# EAGLE board tx (EAGLE 6.1)
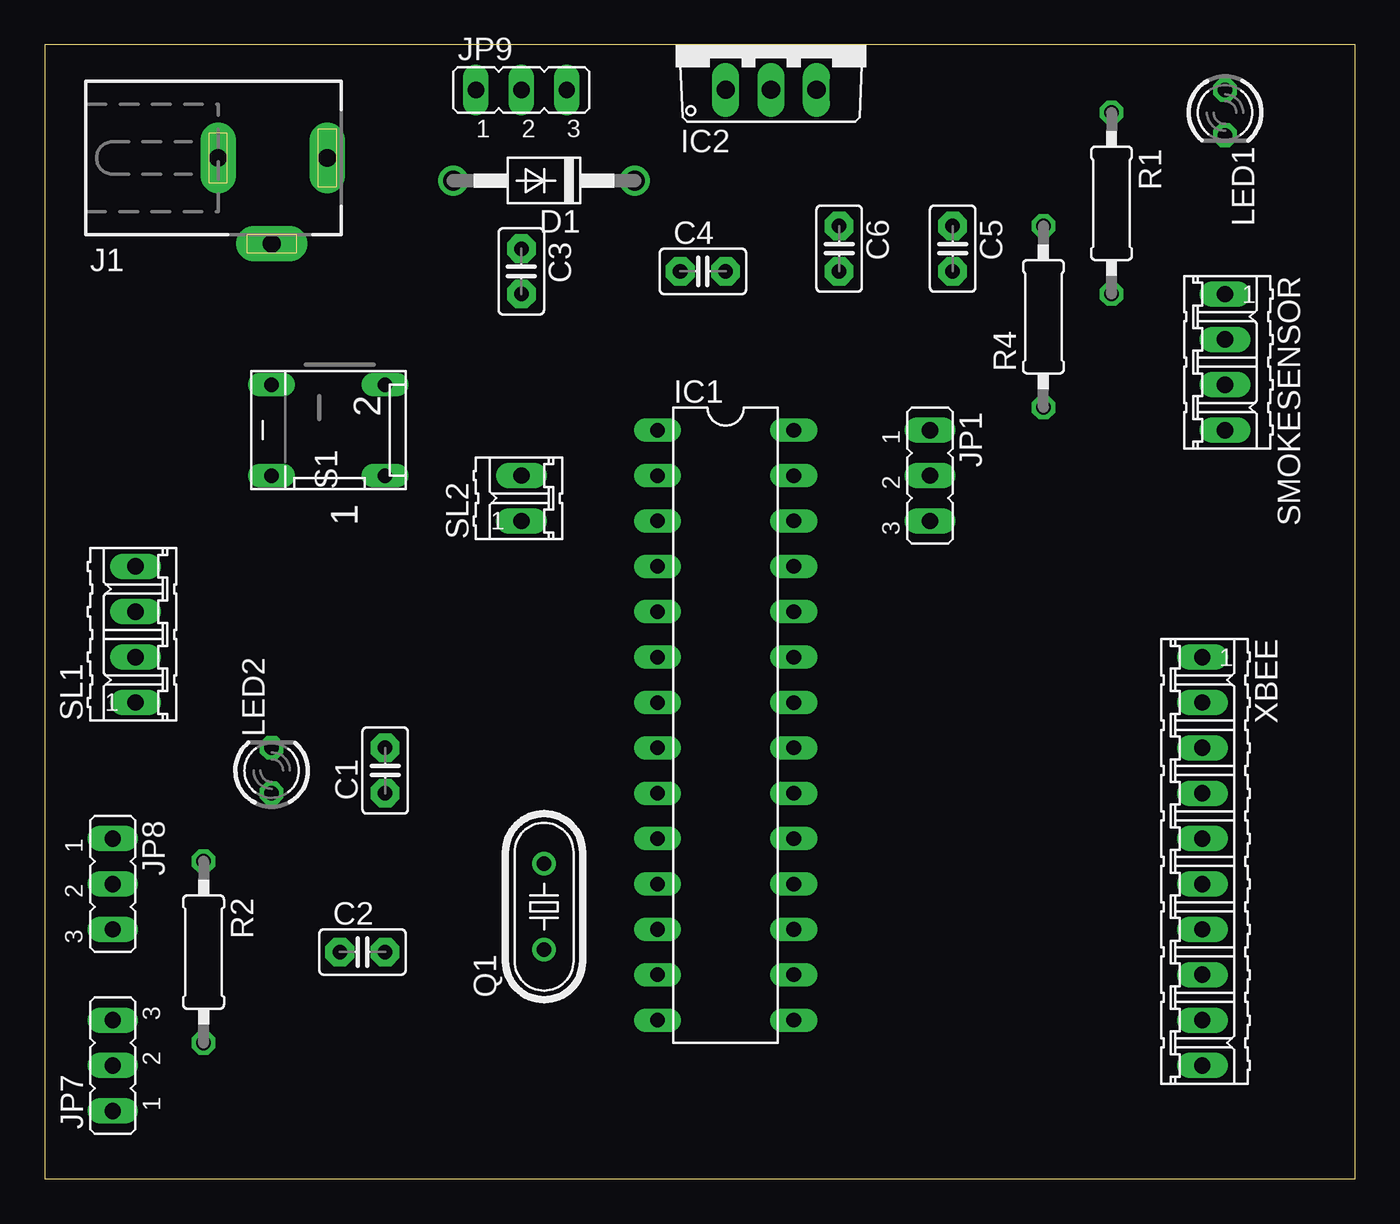
[diagram p0: board, top side]
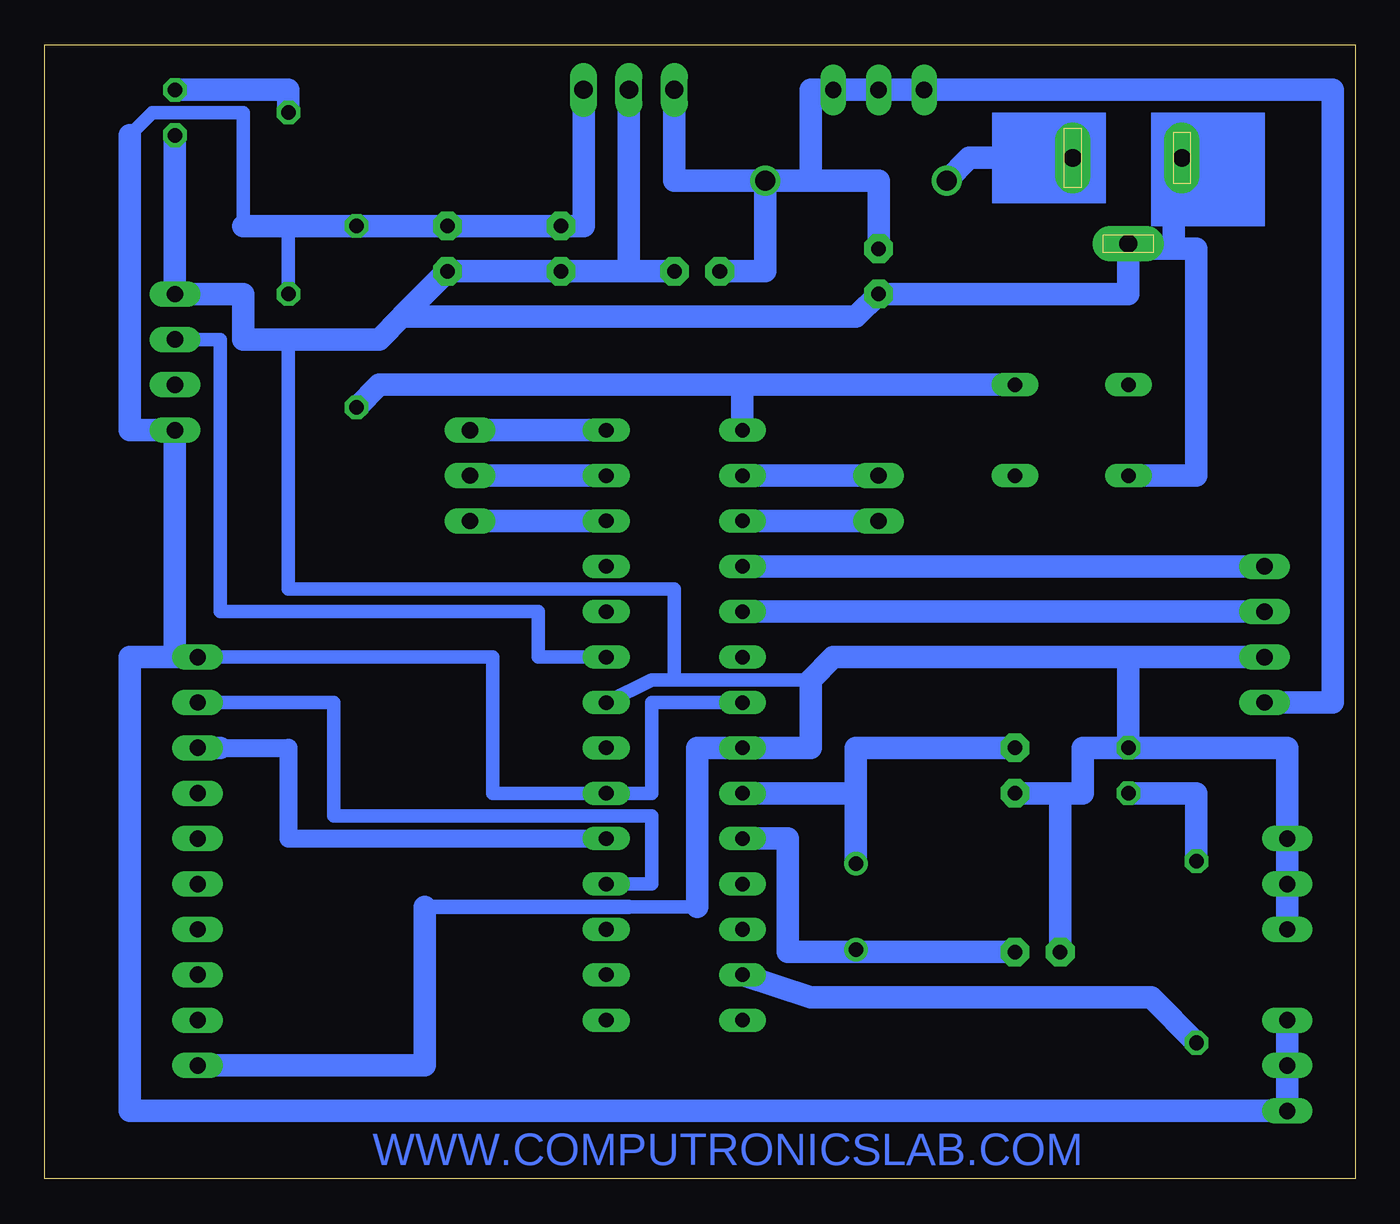
[diagram p1: board, bottom side, seen from below]

Size 73.33 x 63.49 mm. Coordinates in mm from the lower left corner, seen from the top.
Outline: 0,0 73.33,0 73.33,63.49 0,63.49 0,0
Copper layers (1*16): Top 0.035mm / dielectric 1.5mm / Bottom 0.035mm
Design rules: minimum track width 30mil, minimum drill 24mil, track to track 8mil, track to pad 8mil, pad to pad 8mil, via to via 8mil, smd to smd 8mil, copper to edge 40mil, drill to drill 8mil, minimum pad ring 10mil, minimum via ring 8mil, stop-mask expansion 4mil, vias tented up to drill 0mil, thermal gap 10mil

## Footprints (pad centres in the part's own frame; a part is rotated, then mirrored left to right if it is on the bottom)
C2.5-2 = drill 0.813 pad 1.6 octagon: 1 -1.27,0; 2 1.27,0
DO41-10 = drill 1.118: A 5.08,0; C -5.08,0
DIL28-3 = drill 0.813 long: 1 -16.51,-3.81; 2 -13.97,-3.81; 3 -11.43,-3.81; 4 -8.89,-3.81; 5 -6.35,-3.81; 6 -3.81,-3.81; 7 -1.27,-3.81; 8 1.27,-3.81; 9 3.81,-3.81; 10 6.35,-3.81; 11 8.89,-3.81; 12 11.43,-3.81; 13 13.97,-3.81; 14 16.51,-3.81; 15 16.51,3.81; 16 13.97,3.81; 17 11.43,3.81; 18 8.89,3.81; 19 6.35,3.81; 20 3.81,3.81; 21 1.27,3.81; 22 -1.27,3.81; 23 -3.81,3.81; 24 -6.35,3.81; 25 -8.89,3.81; 26 -11.43,3.81; 27 -13.97,3.81; 28 -16.51,3.81
TO220V = drill 1.016 long: 1 -2.54,-2.54; 2 0,-2.54; 3 2.54,-2.54
DCJ0303 = drill 1 pad 2 long: 1 0,3.1; 2 4.8,0; 3 0,-3
JP2 = drill 0.914 long: 1 -2.54,0; 2 0,0; 3 2.54,0
LED3MM = drill 0.813 octagon: A -1.27,0; K 1.27,0
HC49/S = drill 0.813: 1 -2.413,0; 2 2.413,0
0207/10 = drill 0.813 octagon: 1 -5.08,0; 2 5.08,0
DP-02 = drill 0.813 long: 1 -2.54,-2.54; 2 2.54,-2.54; 3 2.54,3.81; 4 -2.54,3.81
04P = drill 0.914 long: 1 -3.81,0; 2 -1.27,0; 3 1.27,0; 4 3.81,0
02P = drill 0.914 long: 1 -1.27,0; 2 1.27,0
10P = drill 0.914 long: 1 -11.43,0; 2 -8.89,0; 3 -6.35,0; 4 -3.81,0; 5 -1.27,0; 6 1.27,0; 7 3.81,0; 8 6.35,0; 9 8.89,0; 10 11.43,0

## Placement (x,y rotation side)
C1  22pf  [C2.5-2]  19.05,22.86 90 top
C2  22pf  [C2.5-2]  17.78,12.7 0 top
C3  100UF  [C2.5-2]  26.67,50.8 270 top
C4  0.1uf  [C2.5-2]  36.83,50.8 0 top
C5  0.1uf  [C2.5-2]  50.8,52.07 270 top
C6  4.7uf  [C2.5-2]  44.45,52.07 270 top
D1  1N4007  [DO41-10]  27.94,55.88 180 top
IC1  ATMEGA328  [DIL28-3]  38.1,25.4 270 top
IC2  7805  [TO220V]  40.64,63.5 0 top
J1  [DCJ0303]  12.7,57.15 270 top
JP1  [JP2]  49.53,39.37 270 top
JP7  [JP2]  3.81,6.35 90 top
JP8  [JP2]  3.81,16.51 270 top
JP9  [JP2]  26.67,60.96 0 top
LED1  [LED3MM]  66.04,59.69 270 top
LED2  [LED3MM]  12.7,22.86 90 top
Q1  16MHZ  [HC49/S]  27.94,15.24 90 top
R1  220R  [0207/10]  59.69,54.61 270 top
R2  330R  [0207/10]  8.89,12.7 270 top
R4  10K  [0207/10]  55.88,48.26 90 top
S1  [DP-02]  16.51,41.91 90 top
SL1  GSM  [04P]  5.08,30.48 90 top
SL2  [02P]  26.67,38.1 90 top
SMOKESENSOR  [04P]  66.04,45.72 270 top
XBEE  [10P]  64.77,17.78 270 top

## Library data of the parts
C1-C6 = capacitor-wima
D1 = diode
IC1 = quantum-research-group; OC_FARNELL: unknown; OC_NEWARK: unknown
IC2 = linear
J1 = con-jack; OC_FARNELL: unknown; OC_NEWARK: unknown
JP1 JP7-JP9 = jumper
LED1 LED2 = led
Q1 = crystal; OC_FARNELL: 1667008; OC_NEWARK: unknown
R1 R2 R4 = rcl
S1 = switch-dil; MPN: MCDP02; OC_FARNELL: 1255233; OC_NEWARK: 26M1095
SL1 SL2 SMOKESENSOR XBEE = con-amp-quick; OC_FARNELL: unknown; OC_NEWARK: unknown

## Nets
N$1: C1.2 IC1.9 Q1.2
N$2: C2.2 IC1.10 Q1.1
N$3: D1.A J1.1
N$4: C5.1 C6.1 IC1.7 IC1.20 IC2.3 JP7.1 JP7.2 JP7.3 R1.2 R4.2 SMOKESENSOR.4 XBEE.1
N$5: C1.1 C2.1 C3.2 C4.2 C5.2 C6.2 IC1.8 IC1.22 IC2.2 J1.2 J1.3 JP8.1 JP8.2 JP8.3 LED1.K LED2.K S1.4 SL1.2 SMOKESENSOR.1 XBEE.10
N$6: LED1.A R1.1
N$7: C3.1 C4.1 D1.C IC2.1 JP9.1 JP9.2 JP9.3 SL1.1
N$8: IC1.28 JP1.1
N$9: IC1.27 JP1.2
N$10: IC1.26 JP1.3
N$11: IC1.18 XBEE.2
N$12: IC1.19 XBEE.3
N$13: IC1.23 SMOKESENSOR.2
N$14: IC1.5 SL1.3
N$15: IC1.2 SL2.2
N$16: IC1.3 SL2.1
N$17: IC1.4 SL1.4
N$21: IC1.13 R2.2
N$31: IC1.1 R4.1 S1.2
N$32: LED2.A R2.1

## Tracks (layer width: path | path; a pad name or v marks a point on that pad's centre or on a via)
N$1
  Bottom 0.762: 27.94,21.59 27.94,17.78 | 27.94,17.78 Q1.2 27.94,17.78
  Bottom 1.27: 27.94,21.59 31.75,21.59 IC1.9 | 27.94,17.78 27.94,24.13 C1.2
N$2
  Bottom 0.762: 27.94,12.7 Q1.1 27.94,12.7
  Bottom 1.27: C2.2 27.94,12.7 31.75,12.7 31.75,19.05 IC1.10
N$3
  Bottom 1.27: D1.A 21.59,57.15 16.51,57.15 J1.1
N$4
  Bottom 0.762: 53.34,53.34 R4.2 59.69,53.34 R1.2 | IC1.7 36.83,26.67 39.37,26.67 39.37,21.59 IC1.20 48.26,21.59 48.26,29.21 49.53,29.21 XBEE.1 | 62.23,53.34 62.23,54.61 62.23,59.69 64.77,59.69 67.31,59.69 68.58,58.42
  Bottom 1.27: IC2.3 43.18,53.34 C6.1 C5.1 53.34,53.34 R4.2 59.69,53.34 62.23,53.34 | JP7.3 JP7.2 JP7.1 66.04,3.81 68.58,3.81 68.58,5.08 68.58,29.21 66.04,29.21 | 66.04,29.21 XBEE.1 66.04,29.21 | 66.04,29.21 SMOKESENSOR.4 68.58,41.91 68.58,58.42
N$5
  Bottom 0.762: 10.16,57.15 J1.3 | IC1.22 39.37,27.94 35.56,27.94 | 30.48,27.94 35.56,27.94 | 36.83,15.24 40.64,15.24 | 59.69,46.99 59.69,33.02 40.64,33.02 38.1,33.02 38.1,27.94 35.56,27.94 | 12.7,52.07 J1.2 12.7,52.07
  Bottom 0.813: 52.07,15.24 43.18,15.24 40.64,15.24
  Bottom 1.27: S1.4 8.89,39.37 8.89,52.07 10.16,52.07 | 10.16,52.07 12.7,52.07 12.7,49.53 24.13,49.53 C3.2 27.94,48.26 53.34,48.26 | 10.16,52.07 10.16,57.15 | LED1.K SMOKESENSOR.1 63.5,49.53 62.23,49.53 62.23,46.99 60.96,46.99 59.69,46.99 54.61,46.99 53.34,48.26 | 40.64,50.8 IC2.2 | C4.2 40.64,50.8 | 40.64,50.8 C6.2 C5.2 53.34,48.26 | JP8.3 JP8.2 JP8.1 3.81,24.13 LED2.K | LED2.K 15.24,24.13 15.24,21.59 16.51,21.59 | C1.1 16.51,21.59 | 16.51,21.59 C2.1 | SL1.2 12.7,29.21 | 12.7,29.21 29.21,29.21 30.48,27.94 30.48,24.13 IC1.8 36.83,24.13 36.83,19.05 36.83,15.24 | XBEE.10 52.07,6.35 52.07,12.7 52.07,15.24 | 12.7,29.21 LED2.K
N$6
  Bottom 1.27: R1.1 59.69,60.96 62.23,60.96 LED1.A
N$7
  Bottom 0.762: D1.C 30.48,55.88
  Bottom 1.27: D1.C 38.1,55.88 38.1,57.15 IC2.1 | 30.48,55.88 26.67,55.88 26.67,54.61 C3.1 | 30.48,55.88 D1.C | D1.C 33.02,50.8 C4.1 | SL1.1 3.81,26.67 1.27,26.67 1.27,27.94 1.27,60.96 JP9.1 JP9.2 JP9.3 30.48,60.96 30.48,55.88
N$8
  Bottom 1.27: JP1.1 IC1.28
N$9
  Bottom 1.27: JP1.2 IC1.27
N$10
  Bottom 1.27: JP1.3 IC1.26
N$11
  Bottom 0.762: IC1.18 39.37,16.51 39.37,19.05 39.37,20.32 57.15,20.32 57.15,25.4 57.15,26.67 63.5,26.67 XBEE.2
N$12
  Bottom 1.016: IC1.19 59.69,19.05 59.69,24.13 63.5,24.13
  Bottom 1.27: XBEE.3 63.5,24.13
N$13
  Bottom 0.762: IC1.23 45.72,29.21 45.72,31.75 46.99,31.75 58.42,31.75 63.5,31.75 63.5,34.29 63.5,36.83 63.5,46.99 SMOKESENSOR.2
N$14
  Bottom 1.27: SL1.3 IC1.5
N$15
  Bottom 1.27: SL2.2 IC1.2
N$16
  Bottom 1.27: SL2.1 IC1.3
N$17
  Bottom 1.27: SL1.4 IC1.4
N$21
  Bottom 1.27: R2.2 11.43,10.16 30.48,10.16 IC1.13
N$31
  Bottom 0.762: 34.29,44.45 S1.2
  Bottom 1.27: IC1.1 34.29,44.45 | R4.1 54.61,44.45 34.29,44.45 | S1.2 34.29,44.45
N$32
  Bottom 1.27: LED2.A 8.89,21.59 8.89,20.32 R2.1
(copper drawn outside any net)
  shapes: Bottom area x2

## Text on the board
Bottom: WWW.COMPUTRONICSLAB.COM